# EAGLE board base1 (EAGLE 7.2.0)

Size 151.45 x 80 mm. Coordinates in mm from the lower left corner, seen from the top.
Outline: 51.45,0 151.45,0 151.45,80 51.45,80 51.45,0
Copper layers (1*16): Top 0.035mm / dielectric 1.5mm / Bottom 0.035mm
Design rules "default": minimum track width 10mil, minimum drill 24mil, track to track 8mil, track to pad 8mil, pad to pad 8mil, via to via 8mil, smd to smd 8mil, copper to edge 40mil, drill to drill 8mil, minimum pad ring 10mil, minimum via ring 8mil, stop-mask expansion 4mil, vias tented up to drill 0mil, thermal gap 10mil

## Footprints (pad centres in the part's own frame; a part is rotated, then mirrored left to right if it is on the bottom)
0603-CAP = smd 1 x 1: 1 -0.8,0; 2 0.8,0
0805 = smd 0.8 x 1.2: 1 -0.9,0; 2 0.9,0
EIA3216 = smd 1.4 x 1.6: A 1.4,0; C -1.4,0
0402-CAP = smd 0.7 x 0.9: 1 -0.65,0; 2 0.65,0
0805-NO = smd 1.3 x 1.5: 1 -0.95,0; 2 0.95,0
JSTPH2 = smd 1 x 4.6: 1 -1,-3.7; 2 1,-3.7 | smd 1.6 x 3.4: NC1 -3.4,1.5; NC2 3.4,1.5
2,8-PAD = drill 2.8 pad 5.334: B2,8 0,0
1X02_ROUND = drill 1 pad 1.778: 1 -1.27,0; 2 1.27,0
0603 = smd 1 x 1: 1 -0.8,0; 2 0.8,0
1007 = smd 2 x 0.8: 1 0,1; 2 0,-1
LED-TRICOLOR-SMD-MF = smd 0.7 x 1.2: A 0.7,1.5; B 0.7,-1.5; G -0.7,-1.5; R -0.7,1.5
LED-1206 = smd 1.2 x 1.4: A -1.6,0; C 1.6,0
CHIPLED_0805_NOOUTLINE = smd 1.2 x 1.2: A 0,-1.05; C 0,1.05
LENSMOUNT-20MM = drill 2.54 pad 4.445: P$1 -10,0; P$2 10,0
SMD1,27-2,54 = smd 1.27 x 2.54: 1 0,0
SOT23-3 = smd 0.8 x 0.9: 1 -0.95,-1; 2 0.95,-1; 3 0,1.1
0603-RES = smd 1.1 x 1: 1 -0.85,0; 2 0.85,0
EXBV8V = smd 0.45 x 0.7: 1 -1.2,-0.775; 2 -0.4,-0.775; 3 0.4,-0.775; 4 1.2,-0.775; 5 1.2,0.775; 6 0.4,0.775; 7 -0.4,0.775; 8 -1.2,0.775
SOLDERJUMPER_ARROW_NOPASTE = smd 0.762 x 1.524: 1 -1.016,0; 2 1.016,0
LQFP100 = smd 0.9 x 0.3: 1 -7.72,6; 2 -7.72,5.5; 3 -7.72,5; 4 -7.72,4.5; 5 -7.72,4; 6 -7.72,3.5; 7 -7.72,3; 8 -7.72,2.5; 9 -7.72,2; 10 -7.72,1.5; 11 -7.72,1; 12 -7.72,0.5; 13 -7.72,0; 14 -7.72,-0.5; 15 -7.72,-1; 16 -7.72,-1.5; 17 -7.72,-2; 18 -7.72,-2.5; 19 -7.72,-3; 20 -7.72,-3.5; 21 -7.72,-4; 22 -7.72,-4.5; 23 -7.72,-5; 24 -7.72,-5.5; 25 -7.72,-6; 51 7.72,-6; 52 7.72,-5.5; 53 7.72,-5; 54 7.72,-4.5; 55 7.72,-4; 56 7.72,-3.5; 57 7.72,-3; 58 7.72,-2.5; 59 7.72,-2; 60 7.72,-1.5; 61 7.72,-1; 62 7.72,-0.5; 63 7.72,0; 64 7.72,0.5; 65 7.72,1; 66 7.72,1.5; 67 7.72,2; 68 7.72,2.5; 69 7.72,3; 70 7.72,3.5; 71 7.72,4; 72 7.72,4.5; 73 7.72,5; 74 7.72,5.5; 75 7.72,6 | smd 0.3 x 0.9: 26 -6,-7.72; 27 -5.5,-7.72; 28 -5,-7.72; 29 -4.5,-7.72; 30 -4,-7.72; 31 -3.5,-7.72; 32 -3,-7.72; 33 -2.5,-7.72; 34 -2,-7.72; 35 -1.5,-7.72; 36 -1,-7.72; 37 -0.5,-7.72; 38 0,-7.72; 39 0.5,-7.72; 40 1,-7.72; 41 1.5,-7.72; 42 2,-7.72; 43 2.5,-7.72; 44 3,-7.72; 45 3.5,-7.72; 46 4,-7.72; 47 4.5,-7.72; 48 5,-7.72; 49 5.5,-7.72; 50 6,-7.72; 76 6,7.72; 77 5.5,7.72; 78 5,7.72; 79 4.5,7.72; 80 4,7.72; 81 3.5,7.72; 82 3,7.72; 83 2.5,7.72; 84 2,7.72; 85 1.5,7.72; 86 1,7.72; 87 0.5,7.72; 88 0,7.72; 89 -0.5,7.72; 90 -1,7.72; 91 -1.5,7.72; 92 -2,7.72; 93 -2.5,7.72; 94 -3,7.72; 95 -3.5,7.72; 96 -4,7.72; 97 -4.5,7.72; 98 -5,7.72; 99 -5.5,7.72; 100 -6,7.72
SOT23-5 = smd 0.55 x 1.2: 1 -0.95,-1.3; 2 0,-1.3; 3 0.95,-1.3; 4 0.95,1.3; 5 -0.95,1.3
IBGA52 = smd 0.5 x 0.5: A1 -3.5,3.5; A2 -2.5,3.5; A3 -1.5,3.5; A4 -0.5,3.5; A5 0.5,3.5; A6 1.5,3.5; A7 2.5,3.5; A8 3.5,3.5; B1 -3.5,2.5; B2 -2.5,2.5; B3 -1.5,2.5; B4 -0.5,2.5; B5 0.5,2.5; B6 1.5,2.5; B7 2.5,2.5; B8 3.5,2.5; C1 -3.5,1.5; C2 -2.5,1.5; C3 -1.5,1.5; C6 1.5,1.5; C7 2.5,1.5; C8 3.5,1.5; D1 -3.5,0.5; D2 -2.5,0.5; D7 2.5,0.5; D8 3.5,0.5; E1 -3.5,-0.5; E2 -2.5,-0.5; E7 2.5,-0.5; E8 3.5,-0.5; F1 -3.5,-1.5; F2 -2.5,-1.5; F3 -1.5,-1.5; F6 1.5,-1.5; F7 2.5,-1.5; F8 3.5,-1.5; G1 -3.5,-2.5; G2 -2.5,-2.5; G3 -1.5,-2.5; G4 -0.5,-2.5; G5 0.5,-2.5; G6 1.5,-2.5; G7 2.5,-2.5; G8 3.5,-2.5; H1 -3.5,-3.5; H2 -2.5,-3.5; H3 -1.5,-3.5; H4 -0.5,-3.5; H5 0.5,-3.5; H6 1.5,-3.5; H7 2.5,-3.5; H8 3.5,-3.5
TSOT25 = smd 0.55 x 1.2: 1 -0.95,-1.3; 2 0,-1.3; 3 0.95,-1.3; 4 0.95,1.3; 5 -0.95,1.3
USB_TYPE_C_DS_2 = smd 0.25 x 4: A1 2.75,-2.45; A4 1.25,-2.45; A9 -1.25,-2.45; A12 -2.75,-2.45 | smd 0.25 x 3.5: A2 2.25,-2.7; A3 1.75,-2.7; A5 0.75,-2.7; A6 0.25,-2.7; A7 -0.25,-2.7; A8 -0.75,-2.7; A10 -1.75,-2.7; A11 -2.25,-2.7 | smd 0.25 x 4 bottom: B1 -2.75,-2.45; B4 -1.25,-2.45; B9 1.25,-2.45; B12 2.75,-2.45 | smd 0.25 x 3.5 bottom: B2 -2.25,-2.7; B3 -1.75,-2.7; B5 -0.75,-2.7; B6 -0.25,-2.7; B7 0.25,-2.7; B8 0.75,-2.7; B10 1.75,-2.7; B11 2.25,-2.7
CRYSTAL-2.5X2.0 = smd 1 x 0.9: 1 -0.95,-0.8; 2 0.9,-0.8; 3 0.9,0.75; 4 -0.95,0.75

## Placement (x,y rotation side)
C1  1uF  [0603-CAP]  7,63.5 0 top
C2  22uF  [0805]  -3.16,58.42 0 top
C3  10uF  [0805]  -6.97,58.42 0 top  (outside the outline)
C4  1uF  [0603-CAP]  3.19,63.5 0 top
C5  0.1uF  [0603-CAP]  -0.62,63.5 0 top
C6  0.1uF  [0603-CAP]  -4.43,63.5 0 top  (outside the outline)
C7  0.1uF  [0603-CAP]  -8.24,63.5 0 top  (outside the outline)
C8  0.1uF  [0603-CAP]  -12.05,63.5 0 top  (outside the outline)
C9  0.1uF  [0603-CAP]  36.21,67.31 0 top
C11  47uF  [EIA3216]  27.32,63.5 0 top
C12  10uF  [0805]  -10.78,58.42 0 top  (outside the outline)
C13  0.1uF  [0603-CAP]  32.4,67.31 0 top
C14  22uF  [0805]  -14.59,58.42 0 top  (outside the outline)
C16  0.1uF  [0402-CAP]  -1.89,67.31 0 top
C17  0.1uF  [0402-CAP]  -5.7,67.31 0 top  (outside the outline)
C18  22uF  [0805]  36.21,63.5 0 top
C19  0.1uF  [0402-CAP]  -9.51,67.31 0 top  (outside the outline)
C20  0.1uF  [0402-CAP]  -13.32,67.31 0 top  (outside the outline)
C21  10µF  [0805-NO]  33.67,71.12 0 top
C22  10µF  [0805-NO]  27.32,71.12 0 top
C40  12pF  [0603-CAP]  28.59,67.31 0 top
C41  12pF  [0603-CAP]  24.78,67.31 0 top
C44  22uF  [0805]  32.4,63.5 0 top
C48  2.2uF  [0603-CAP]  20.97,67.31 0 top
C49  2.2uF  [0603-CAP]  17.16,67.31 0 top
CN2  JSTPH  [JSTPH2]  -3.16,30.48 0 top
H3  MOUNT-PAD-ROUND2.8  [2,8-PAD]  -12.05,27.94 0 top  (outside the outline)
H4  MOUNT-PAD-ROUND2.8  [2,8-PAD]  34.94,45.72 0 top
JP4  [1X02_ROUND]  26.05,58.42 0 top
JP5  [1X02_ROUND]  19.7,58.42 0 top
L1  MPZ1608S181ATAH0  [0603]  18.43,63.5 0 top
L3  4.7uH/1.4A  [1007]  -3.16,52.07 0 top  (outside the outline)
L4  MPZ1608S181ATAH0  [0603]  10.81,63.5 0 top
LED1  LED-TRICOLOR  [LED-TRICOLOR-SMD-MF]  1.92,52.07 0 top
LED2  VSMY12850  [LED-1206]  -8.24,52.07 0 top  (outside the outline)
LED3  VSMY12850  [LED-1206]  -13.32,52.07 0 top  (outside the outline)
LED4  RED  [CHIPLED_0805_NOOUTLINE]  36.21,59.69 0 top
LED5  GREEN  [CHIPLED_0805_NOOUTLINE]  31.13,59.69 0 top
LM1  LENSMOUNT20MM  [LENSMOUNT-20MM]  24.78,33.02 0 top
PAD1  [SMD1,27-2,54]  -1.89,44.45 0 top
PAD2  [SMD1,27-2,54]  -5.7,44.45 0 top  (outside the outline)
PAD3  [SMD1,27-2,54]  -9.51,44.45 0 top  (outside the outline)
PAD4  [SMD1,27-2,54]  -13.32,44.45 0 top  (outside the outline)
PAD5  [SMD1,27-2,54]  37.48,53.34 0 top
PAD6  [SMD1,27-2,54]  33.67,53.34 0 top
PAD7  [SMD1,27-2,54]  29.86,53.34 0 top
PAD8  [SMD1,27-2,54]  26.05,53.34 0 top
Q1  BSS138  [SOT23-3]  4.46,58.42 0 top
R1  10R  [0603-RES]  13.35,67.31 0 top
R2  10K  [0603-RES]  9.54,67.31 0 top
R3  470  [0805-NO]  20.97,71.12 0 top
R4  470  [0805-NO]  14.62,71.12 0 top
R5  100K  [0603-RES]  5.73,67.31 0 top
R6  10K\  [0805-NO]  8.27,71.12 0 top
R7  2.5K  [0805-NO]  1.92,71.12 0 top
R10  451K6  [0603-RES]  1.92,67.31 0 top
RN1  220R  [EXBV8V]  27.32,44.45 0 top
RN3  10K  [EXBV8V]  22.24,44.45 0 top
RN4  10K  [EXBV8V]  17.16,44.45 0 top
SJ1  [SOLDERJUMPER_ARROW_NOPASTE]  0.65,58.42 0 top
U1  STM32H743VIT6  [LQFP100]  8.27,8.89 0 top
U2  MCP73831T-2ACI/OT  [SOT23-5]  8.27,58.42 0 top
U4  MT9V022  [IBGA52]  7,29.21 0 top
U5  TPS731XX  [SOT23-5]  8.27,52.07 0 top
U8  PAM2305AABADJ  [TSOT25]  12.08,52.07 0 top
U$8  PCB_USB_C_2.0DS_2  [USB_TYPE_C_DS_2]  7,46.99 0 top
Y1  7S-12.000MAHE-T  [CRYSTAL-2.5X2.0]  18.43,52.07 0 top

## Library data of the parts
C1-C9 C11-C14 C16-C20 C40 C41 C44 C48 C49 L1 L3 L4 LED1-LED3 Q1 R1 R2 R5 R10 = sfe
C21 C22 CN2 JP4 JP5 LED4 LED5 R3 R4 R6 R7 U2 = microbuilder
H3 H4 = holes
LM1 = omnivision
PAD1-PAD8 = wirepad
RN1 RN3 RN4 = resistor-dil; OC_FARNELL: unknown; OC_NEWARK: unknown
SJ1 = microbuilder; BOM: EXCLUDE
U1 = stm32
U4 = MT9V022
U5 Y1 = mux
U8 = regulators
U$8 = USB_pcb_connectors

## Nets
BOOT0: RN3.3 U1.94
DAC: U1.29
DCMI_CLK: U1.67 U4.A5
DCMI_D0: U1.63 U4.A6
DCMI_D1: U1.64 U4.B6
DCMI_D2: U1.97 U4.A7
DCMI_D3: U1.98 U4.A8
DCMI_D4: U1.3 U4.B7
DCMI_D5: U1.92 U4.E1
DCMI_D6: U1.4 U4.F1
DCMI_D7: U1.5 U4.F2
DCMI_D8: U4.G1
DCMI_D9: U4.H1
DCMI_HSYNC: U1.28 U4.H2
DCMI_PCLK: U1.30 U4.B5
DCMI_PWDN: RN4.7 U1.88 U4.F8
DCMI_RST: RN4.8 U1.69 U4.G8
DCMI_SCL: U4.H4
DCMI_SDA: U4.G4
DCMI_VSYNC: U1.93 U4.G2
EXPST: U1.55
FREX: U1.56
FS_DM: U1.70
FS_DP: U1.71
GND: C1.2 C2.2 C3.1 C4.2 C5.2 C6.2 C7.2 C8.2 C9.2 C11.C C12.1 C13.2 C14.1 C16.2 C17.2 C18.1 C19.2 C20.2 C21.2 C22.2 C40.1 C41.1 C44.1 C48.2 C49.2 CN2.1 JP4.2 JP5.2 LED5.C PAD2.1 PAD4.1 PAD6.1 Q1.2 R2.1 R5.1 R6.2 R7.2 RN3.6 RN4.2 U1.10 U1.19 U1.26 U1.49 U1.74 U1.99 U2.2 U4.B1 U4.C3 U4.C6 U4.C7 U4.F3 U4.F6 U4.H7 U5.2 U8.2 U$8.A4 U$8.A9 U$8.B4 U$8.B9 Y1.2 Y1.4
GPIO1: U1.84
GPIO2: U1.85
GPIO3: U1.82
GPIOB1: PAD3.1
GPIOB2: PAD5.1
I2C1_SCL: U1.95
I2C1_SDA: U1.96
I2C2_SCL: U1.46
I2C2_SDA: U1.47
LED_B: RN1.6 U1.17
LED_G: RN1.7 U1.16
LED_IR: RN1.5 U1.1
LED_R: RN1.8 U1.15
N$1: LED4.C R3.1
N$2: C40.2 U1.13 Y1.3
N$3: R3.2 R4.2 U2.1
N$4: C41.2 U1.12 Y1.1
N$5: Q1.1 R2.2 RN1.4
N$6: LED1.B RN1.3
N$8: LED1.R RN1.1
N$9: LED1.G RN1.2
N$10: LED3.C R1.2
N$11: C7.1 U5.4
N$12: C4.1 C5.1 L1.1 U1.20 U1.21
N$13: R5.2 R10.2 U8.4
N$14: Q1.3 R1.1
N$15: R6.1 SJ1.2 U2.5
N$16: LED5.A R4.1
N$17: LED2.C LED3.A
N$18: R7.1 SJ1.1
N$19: RN4.5 U4.G7
N$20: RN4.6 U4.H8
N$30: U1.62
N$31: U1.22
N$32: U1.23
N$33: U1.24
N$34: U1.25
NRST: C1.1 RN3.4 U1.14
RAW: C22.1 C44.2 CN2.2 JP5.1 U2.3 U8.1 U8.3
SD_CD: U1.81
SDIO_CLK: U1.80
SDIO_CMD: U1.83
SDIO_D0: U1.65
SDIO_D2: U1.78
SDIO_D3: U1.79
SPI2_MISO: U1.53
SPI2_MOSI: U1.54
SPI2_NSS: U1.51
SPI2_SCLK: U1.52
SPI3_MISO: U1.90 U4.H3
SPI3_MOSI: U1.91 U4.G3
SPI3_SCLK: U4.G5
SPI3_SCLK/TRACESWO: U1.89
SPI3_SSEL: U1.77 U4.G6
SW: L3.1 U8.5
SWCLK: U1.76
SWDIO: U1.72
TIM4_CH1: U1.59
TIM4_CH2: U1.60
TIM4_CH3: U1.61
UART2_RX: U1.87
UART2_TX: U1.86
VAA: C14.2 C19.1 C20.1 L4.2 U4.B8 U4.C8 U4.F7
VBAT: C2.1 C3.2 C6.1 C8.1 C9.1 C11.A C13.1 C16.1 C17.1 C18.2 L1.2 L3.2 LED1.A LED2.A R10.1 RN3.5 RN4.1 RN4.3 RN4.4 U1.6 U1.11 U1.27 U1.50 U1.75 U1.100 U4.A1 U4.A4 U4.B4 U4.E2 U4.H6 U5.1 U5.3
VBUS: U1.68
VCAP1: C49.1 U1.48
VCAP2: C48.1 U1.73
VDD: C21.1 JP4.1 LED4.A U2.4 U$8.A1 U$8.A12 U$8.B1 U$8.B12
VDDA: C12.2 L4.1 U5.5
VIN: PAD1.1

## Tracks (layer width: path | path; a pad name or v marks a point on that pad's centre or on a via)
BOOT0  (1 unrouted)
DCMI_CLK  (1 unrouted)
DCMI_D0  (1 unrouted)
DCMI_D1  (1 unrouted)
DCMI_D2  (1 unrouted)
DCMI_D3  (1 unrouted)
DCMI_D4  (1 unrouted)
DCMI_D5  (1 unrouted)
DCMI_D6  (1 unrouted)
DCMI_D7  (1 unrouted)
DCMI_HSYNC  (1 unrouted)
DCMI_PCLK  (1 unrouted)
DCMI_PWDN  (2 unrouted)
DCMI_RST  (2 unrouted)
DCMI_VSYNC  (1 unrouted)
GND  (57 unrouted)
LED_B  (1 unrouted)
LED_G  (1 unrouted)
LED_IR  (1 unrouted)
LED_R  (1 unrouted)
N$1  (1 unrouted)
N$2  (2 unrouted)
N$3  (2 unrouted)
N$4  (2 unrouted)
N$5  (2 unrouted)
N$6  (1 unrouted)
N$8  (1 unrouted)
N$9  (1 unrouted)
N$10  (1 unrouted)
N$11  (1 unrouted)
N$12  (4 unrouted)
N$13  (2 unrouted)
N$14  (1 unrouted)
N$15  (2 unrouted)
N$16  (1 unrouted)
N$17  (1 unrouted)
N$18  (1 unrouted)
N$19  (1 unrouted)
N$20  (1 unrouted)
NRST  (2 unrouted)
RAW  (6 unrouted)
SPI3_MISO  (1 unrouted)
SPI3_MOSI  (1 unrouted)
SPI3_SSEL  (1 unrouted)
SW  (1 unrouted)
VAA  (6 unrouted)
VBAT  (31 unrouted)
VCAP1  (1 unrouted)
VCAP2  (1 unrouted)
VDD  (4 unrouted)
VDDA  (2 unrouted)